# Altium PCB PCB1.pcbdoc
Units mil, origin at the board's own origin, x right, y up, seen from the top; angles counter-clockwise.
Board outline 3095 x 3275 mil, 2 copper layers (Top Layer, Bottom Layer); 43 components, 35 nets, 210 pads, 97 vias.
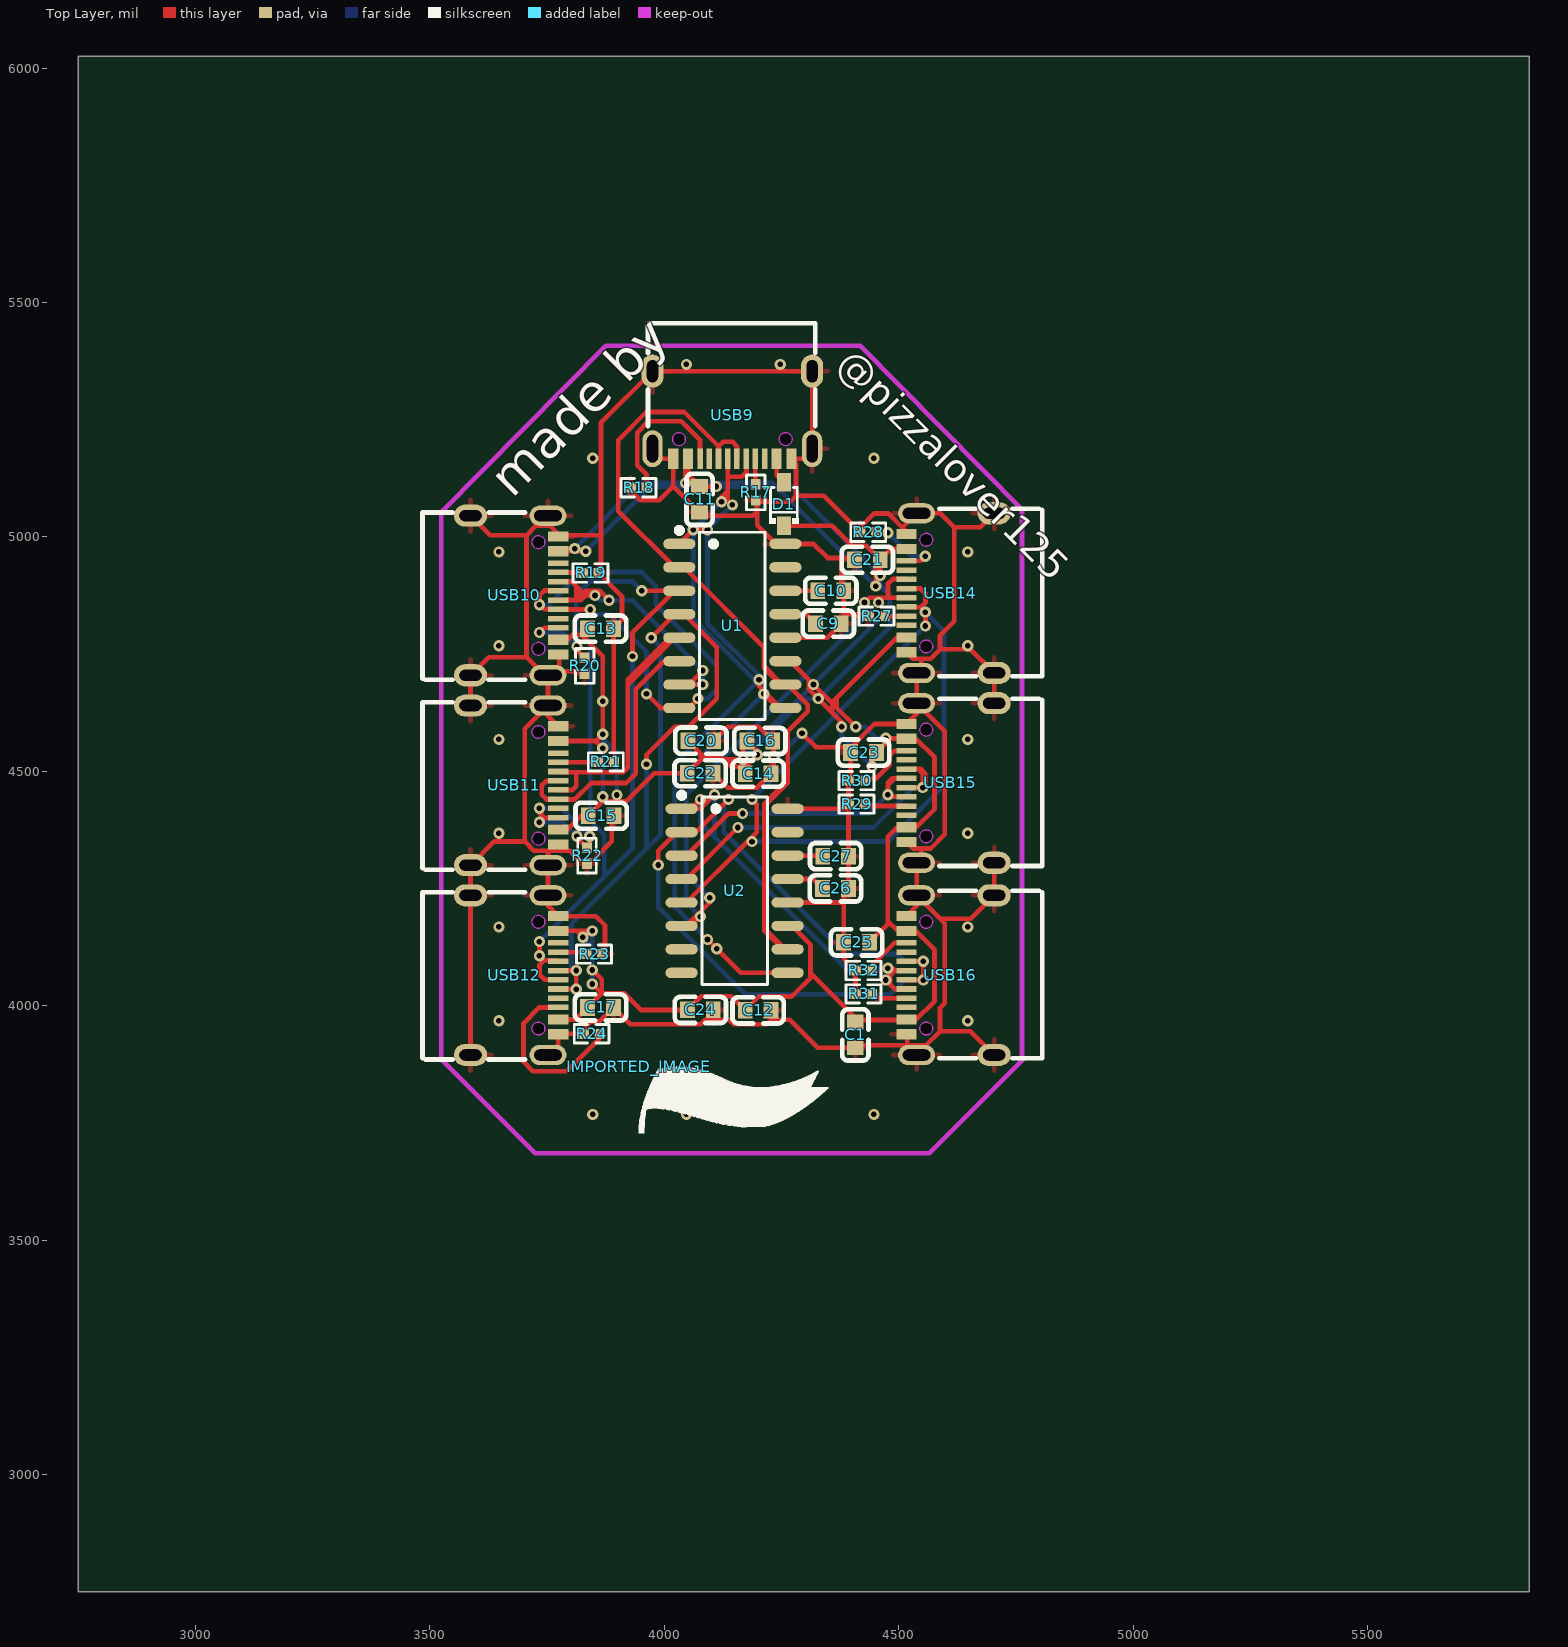
[diagram p0: Top Layer view]
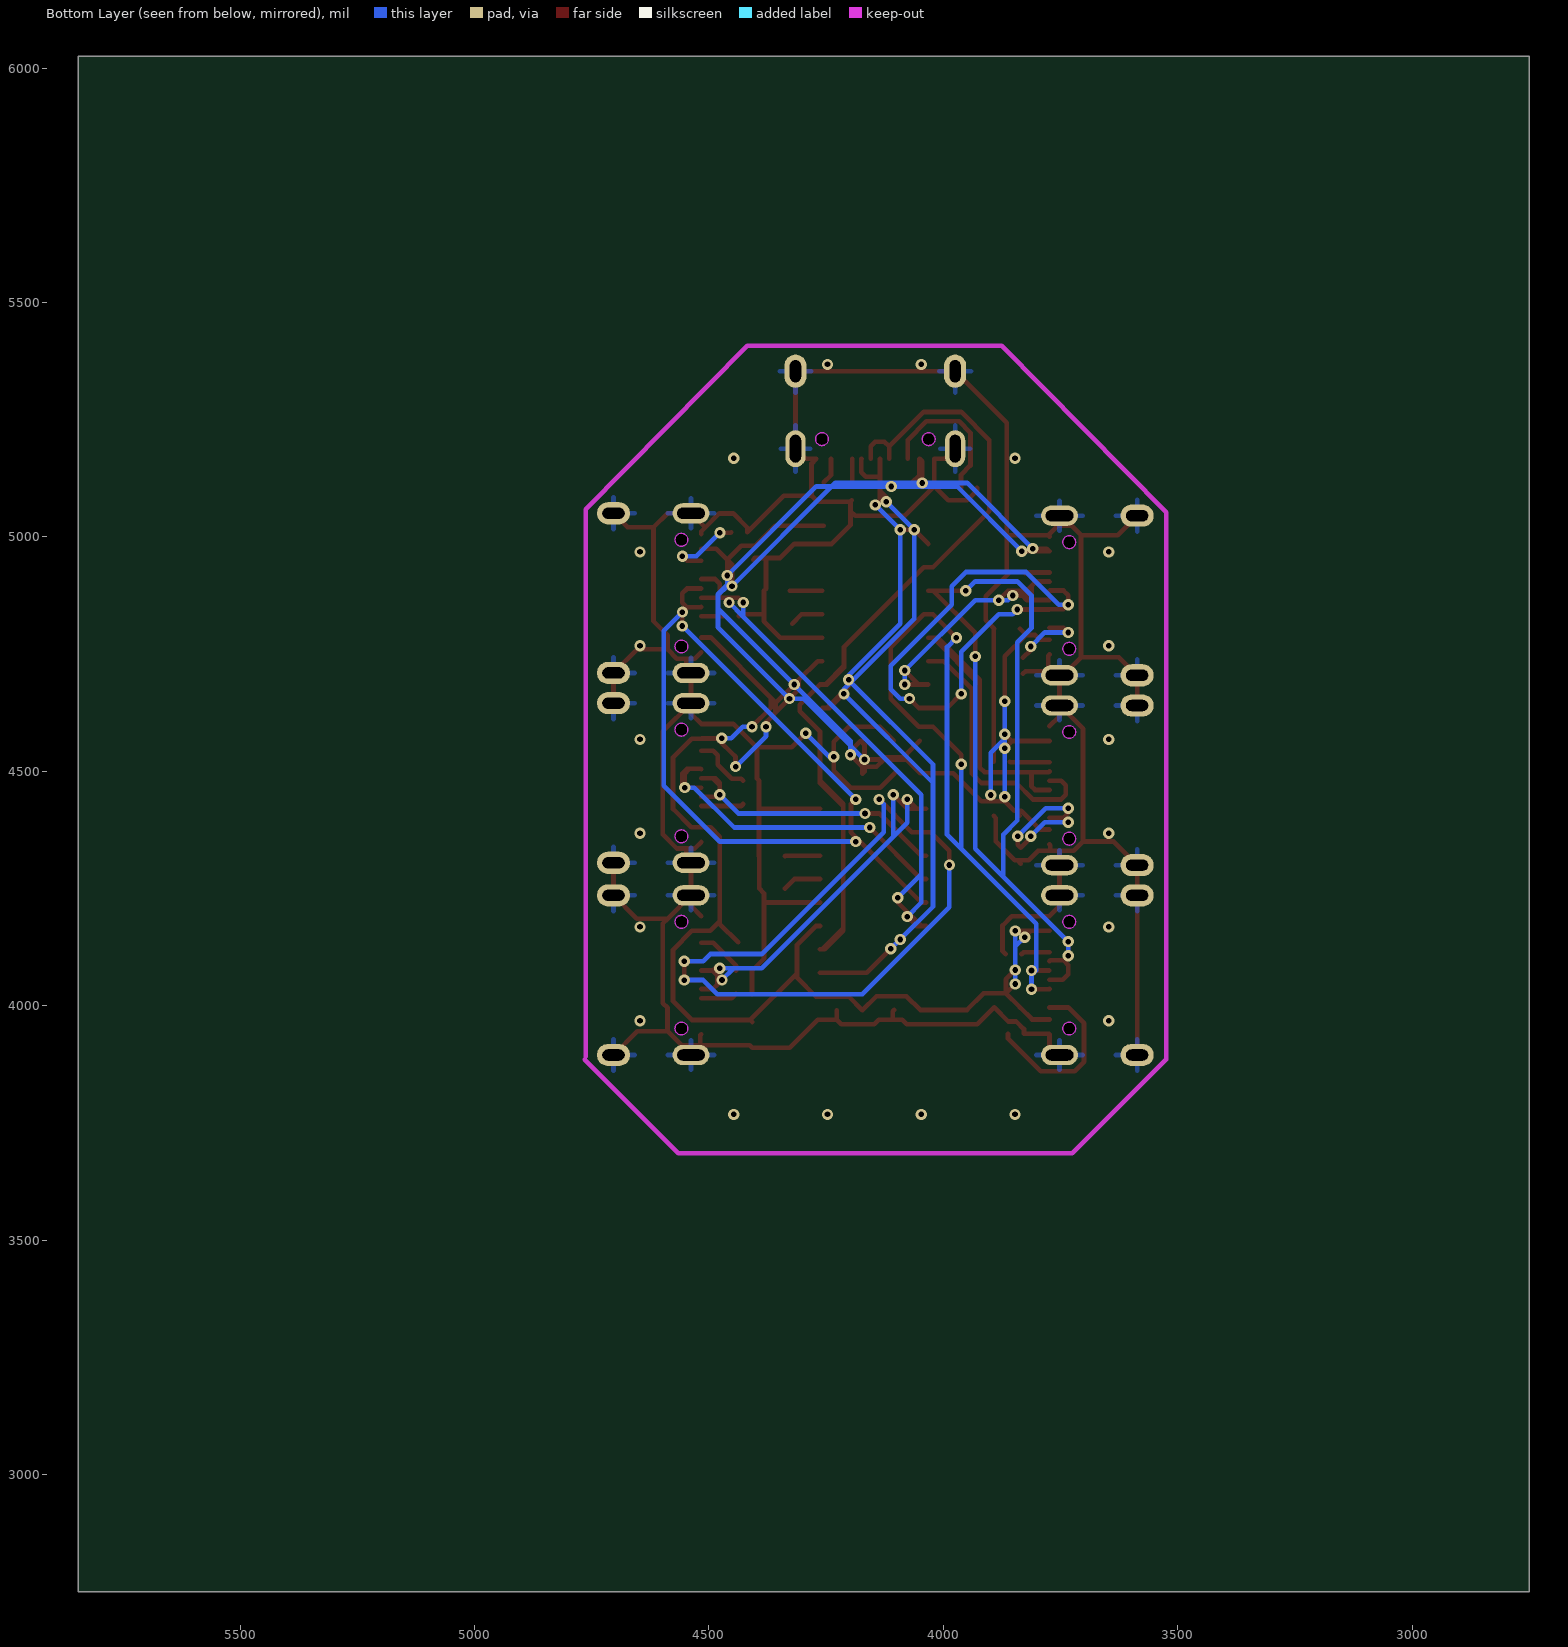
[diagram p1: Bottom Layer view, seen from below]

## Layer stack, top to bottom
Top Layer: signal copper (thickness not stored)
Dielectric: dielectric 12.6, FR-4, Dk 4.8
Bottom Layer: signal copper (thickness not stored)

## Board outline
5845,2750 2750,2750 2750,6025 5845,6025

## Design rules (kind name [scope] priority, off if disabled: settings)
BoardOutlineClearance copperThickness1oz [All] p0: genericclearance=10 ignorepadtopadclearanceinfootprint=FALSE except(0: Arc-SplitContinuation Track-SplitContinuation SMDPad-SplitContinuation THPad-SplitContinuation Via-SplitContinuation Fill-SplitContinuation Poly-SplitContinuation Region-SplitContinuation Text-SplitContinuation; 6: Track-CutoutEdge SMDPad-CutoutEdge THPad-CutoutEdge Via-CutoutEdge Region-CutoutEdge; 11.8: Track-OutlineEdge SMDPad-OutlineEdge THPad-OutlineEdge Via-OutlineEdge Fill-OutlineEdge Region-OutlineEdge Poly-OutlineEdge Text-OutlineEdge Fill-CutoutEdge)
BoardOutlineClearance copperThickness2oz [All] p0: genericclearance=10 ignorepadtopadclearanceinfootprint=FALSE except(0: Arc-SplitContinuation Track-SplitContinuation SMDPad-SplitContinuation THPad-SplitContinuation Via-SplitContinuation Fill-SplitContinuation Poly-SplitContinuation Region-SplitContinuation Text-SplitContinuation; 6: Track-CutoutEdge SMDPad-CutoutEdge THPad-CutoutEdge Via-CutoutEdge Region-CutoutEdge; 11.8: Track-OutlineEdge SMDPad-OutlineEdge THPad-OutlineEdge Via-OutlineEdge Fill-OutlineEdge Region-OutlineEdge Poly-OutlineEdge Text-OutlineEdge Fill-CutoutEdge)
Clearance copperThickness1oz [(InNet('GND') OR InNet('+5V') OR InNet('$1N7750') OR InNet('$1N7762') OR InNet('$1N10829') OR InNet('$1N10867') OR InNet('$1N10662') OR InNet('$1N4825') OR InNet('$1N8251') OR InNet('$1N8641') OR InNet('$1N9036') OR InNet('$1N9826') OR InNet('$1N10221') OR InNet('$1N10616') OR InNet('DN') OR InNet('DP') OR InNet('N3') OR InNet('P3') OR InNet('N2') OR InNet('P2') OR InNet('N1') OR InNet('P1') OR InNet('N7') OR InNet('P7') OR InNet('N6') OR InNet('P6') OR InNet('N5') OR InNet('P5') OR InNet('$1N11137') OR InNet('$1N11118') OR InNet('$1N11102') OR InNet('$1N11087') OR InNet('$1N11071') OR InNet('$1N11153') OR InNet('$1N11169'))] p1: gap=7 ignorepadtopadclearanceinfootprint=FALSE except(4: Track-Track; 6: Track-SMDPad SMDPad-SMDPad Track-THPad SMDPad-THPad THPad-THPad Track-Via SMDPad-Via THPad-Via Via-Via SMDPad-Fill THPad-Fill Via-Fill Fill-Fill Track-Region SMDPad-Region THPad-Region Via-Region Region-Region Track-Poly SMDPad-Poly THPad-Poly Via-Poly Fill-Poly Region-Poly Poly-Poly Track-Text SMDPad-Text THPad-Text Via-Text Fill-Text Region-Text Poly-Text Text-Text; 6.9: Track-Hole SMDPad-Hole THPad-Hole Via-Hole Fill-Hole Region-Hole Poly-Hole Text-Hole Sheet-Hole; 11.8: Track-Fill Fill-Region Track-Sheet SMDPad-Sheet THPad-Sheet Via-Sheet Fill-Sheet Region-Sheet Poly-Sheet Text-Sheet)
Clearance copperThickness2oz [All] p1: gap=7 ignorepadtopadclearanceinfootprint=FALSE except(6: Track-SMDPad SMDPad-SMDPad Track-THPad SMDPad-THPad THPad-THPad Track-Via SMDPad-Via THPad-Via Via-Via SMDPad-Fill THPad-Fill Via-Fill Fill-Fill Track-Region SMDPad-Region THPad-Region Via-Region Region-Region Track-Poly SMDPad-Poly THPad-Poly Via-Poly Fill-Poly Region-Poly Poly-Poly Track-Text SMDPad-Text THPad-Text Via-Text Fill-Text Region-Text Poly-Text Text-Text; 6.9: Track-Hole SMDPad-Hole THPad-Hole Via-Hole Fill-Hole Region-Hole Poly-Hole Text-Hole Sheet-Hole; 8: Track-Track; 11.8: Track-Fill Fill-Region Track-Sheet SMDPad-Sheet THPad-Sheet Via-Sheet Fill-Sheet Region-Sheet Poly-Sheet Text-Sheet)
DiffPairsRouting differentialPair [All] p1: maxuncoupledlength=10 minlimit=6 maxlimit=6 mostfreqgap=6 toplayer_minwidth=5 toplayer_prefwidth=10 toplayer_maxwidth=100 bottomlayer_minwidth=5 bottomlayer_prefwidth=10 bottomlayer_maxwidth=100
PasteMaskExpansion pasteMaskExpansion [All] p1: expansion=0
PlaneConnect innerPlane [All] p1: planeconnectstyle=Relief reliefexpansion=20 reliefentries=4 reliefconductorwidth=10 reliefairgap=10
PolygonConnect copperRegion [All] p1: connectstyle=Relief reliefentries=4 reliefconductorwidth=10 polygonreliefangle="90 Angle" airgapwidth=10
RoutingVias viaSize [All] p1: viastyle="Through Hole" holewidth=12.0078 minholewidth=11.811 maxholewidth=248.0314 width=24.0158 minwidth=19.685 maxwidth=393.7008
SolderMaskExpansion solderMaskExpansion [All] p1: useseparateexpansions=TRUE expansion=2 expansionbottom=2
Width copperThickness1oz [All] p1: maxlimit=100 minlimit=5 preferedwidth=10
Width copperThickness2oz [All] p1: maxlimit=100 minlimit=8 preferedwidth=10

## Components (designator, comment, footprint, x,y, rotation, side; value= is the part's Value field where it differs from the comment)
C1 "" C0603 4407.56,3937.56 r270 top
C9 "" C0603 4350,4815 r180 top
C10 "" C0603 4355,4885 r180 top
C11 "" C0603 4075,5080 r270 top
C12 "" C0603 4200,3990 r0 top
C13 "" C0603 3863.86,4804.33 r0 top
C14 "" C0603 4200,4495 r0 top
C15 "" C0603 3865,4405 r0 top
C16 "" C0603 4203.86,4564.64 r0 top
C17 "" C0603 3863.86,3996.16 r0 top
C20 "" C0603 4078.02,4565.24 r0 top
C21 "" C0603 4433.14,4951.15 r180 top
C22 "" C0603 4076.32,4495.83 r0 top
C23 "" C0603 4424.88,4540 r180 top
C24 "" C0603 4076.91,3990.83 r0 top
C25 "" C0603 4410,4135 r180 top
C26 "" C0603 4365,4250 r180 top
C27 "" C0603 4365.29,4319.02 r180 top
D1 "" SOD-323_L1.8-W1.3-LS2.5-RD 4255,5070 r90 top
IMPORTED_IMAGE "IMPORTED_IMAGE" IMPORTED_IMAGE 3945,3870 r0 top
R17 "" R0402 4195,5095 r90 top
R18 "" R0402 3945,5105 r0 top
R19 "" R0402 3842.52,4922.98 r180 top
R20 "" R0402 3830,4725 r90 top
R21 "" R0402 3875,4520 r180 top
R22 "" R0402 3835,4320 r90 top
R23 "" R0402 3850,4110 r180 top
R24 "" R0402 3845,3940 r0 top
R27 "" R0402 4452.61,4831.05 r0 top
R28 "" R0402 4435,5010 r0 top
R29 "" R0402 4410,4430 r0 top
R30 "" R0402 4410,4480 r0 top
R31 "" R0402 4425,4025 r0 top
R32 "" R0402 4425,4075 r0 top
U1 "" SOP-16_L10.0-W3.9-P1.27-LS6.0-BL 4145,4810 r270 top
U2 "" SOP-16_L10.0-W3.9-P1.27-LS6.0-BL 4150,4245 r270 top
USB9 "" USB-C-SMD_TYPE-C-6PIN-2MD-073#1 4145,5260 r180 top
USB10 "" USB-C-SMD_TYPE-C-6PIN-2MD-073#2 3680,4875 r270 top
USB11 "" USB-C-SMD_TYPE-C-6PIN-2MD-073#2 3680,4470 r270 top
USB12 "" USB-C-SMD_TYPE-C-6PIN-2MD-073#2 3680,4065 r270 top
USB14 "" USB-C-SMD_TYPE-C-6PIN-2MD-073#2 4610,4880 r90 top
USB15 "" USB-C-SMD_TYPE-C-6PIN-2MD-073#2 4610,4475 r90 top
USB16 "" USB-C-SMD_TYPE-C-6PIN-2MD-073#2 4610,4065 r90 top

## Footprints (in the part's own frame and the unit in brackets; to place one, negate y for a bottom-side part, rotate by r counter-clockwise, add the part's x,y. Pads: shape width x height; smd on the part's side, far side on the other; paste and mask are expansions set on the pad)
C0603 [mm]
  rect 0.8x0.9 smd: 1(-0.7,0) 2(0.7,0)
  silkscreen extent -1.39,-0.71 1.39,0.71
IMPORTED_IMAGE [mil]
  silkscreen extent 0,-142 405,0
R0402 [mm]
  rect 0.566x0.54 smd: 1(-0.433,0) 2(0.433,0)
  silkscreen extent -0.94,-0.5 0.94,0.5
SOD-323_L1.8-W1.3-LS2.5-RD [mm]
  rect 1x0.75 smd: 1(-1.173,0) 2(1.173,0)
  silkscreen extent -1.08,-0.8 0.9,0.8
SOP-16_L10.0-W3.9-P1.27-LS6.0-BL [mm]
  oval 0.56x1.745 smd: 1(-4.445,-2.872) 2(-3.175,-2.872) 3(-1.905,-2.872) 4(-0.635,-2.872) 5(0.635,-2.872) 6(1.905,-2.872) 7(3.175,-2.872) 8(4.445,-2.872) 9(4.445,2.872) 10(3.175,2.872) 11(1.905,2.872) 12(0.635,2.872) 13(-0.635,2.872) 14(-1.905,2.872) 15(-3.175,2.872) 16(-4.445,2.872)
  silkscreen extent -5.33,-3.02 5.08,1.77
USB-C-SMD_TYPE-C-6PIN-2MD-073#1 [mm]
  rect 0.55x1.1 smd: 1(-3.2,2.375) 2(-2.4,2.375) 11(2.4,2.375) 12(3.2,2.375)
  rect 0.3x1.1 smd: 3(-1.75,2.375) 4(-1.25,2.375) 5(-0.75,2.375) 6(-0.25,2.375) 7(0.25,2.375) 8(0.75,2.375) 9(1.25,2.375) 10(1.75,2.375)
  oval 1.2x1.8 hole 0.6 slot 1.2 at 90 deg: 13(-4.325,-2.375) 14(4.325,-2.375)
  oval 1.1x2 hole 0.6 slot 1.5 at 90 deg: 13(-4.325,1.825) 14(4.325,1.825)
  Board Outline Layer circle w0.005: c-2.89,1.305 r0.35
  Board Outline Layer circle w0.005: c2.89,1.305 r0.35
  Board Outline Layer region: -3.24,1.305 -3.205,1.457 -3.108,1.579 -2.968,1.646 -2.812,1.646 -2.672,1.579 -2.575,1.457 -2.54,1.305 -2.54,1.305 -2.575,1.153 -2.672,1.031 -2.812,0.964 -2.968,0.964 -3.108,1.031 -3.205,1.153 -3.24,1.305
  Board Outline Layer region: 2.54,1.305 2.575,1.457 2.672,1.579 2.812,1.646 2.968,1.646 3.108,1.579 3.205,1.457 3.24,1.305 3.24,1.305 3.205,1.153 3.108,1.031 2.968,0.964 2.812,0.964 2.672,1.031 2.575,1.153 2.54,1.305
  Multi-Layer board cut-out: -3.24,1.305 -3.205,1.457 -3.108,1.579 -2.968,1.646 -2.812,1.646 -2.672,1.579 -2.575,1.457 -2.54,1.305 -2.54,1.305 -2.575,1.153 -2.672,1.031 -2.812,0.964 -2.968,0.964 -3.108,1.031 -3.205,1.153 -3.24,1.305
  Multi-Layer board cut-out: 2.54,1.305 2.575,1.457 2.672,1.579 2.812,1.646 2.968,1.646 3.108,1.579 3.205,1.457 3.24,1.305 3.24,1.305 3.205,1.153 3.108,1.031 2.968,0.964 2.812,0.964 2.672,1.031 2.575,1.153 2.54,1.305
  silkscreen extent -4.5,-4.97 4.57,0.6
USB-C-SMD_TYPE-C-6PIN-2MD-073#2 [mm]
  rect 0.55x1.1 smd: 1(-3.2,2.375) 2(-2.4,2.375) 11(2.4,2.375) 12(3.2,2.375)
  rect 0.3x1.1 smd: 3(-1.75,2.375) 4(-1.25,2.375) 5(-0.75,2.375) 6(-0.25,2.375) 7(0.25,2.375) 8(0.75,2.375) 9(1.25,2.375) 10(1.75,2.375)
  oval 1.2x1.8 hole 0.6 slot 1.2 at 90 deg: 13(-4.325,-2.375) 14(4.325,-2.375)
  oval 1.1x2 hole 0.6 slot 1.5 at 90 deg: 13(-4.325,1.825) 14(4.325,1.825)
  Board Outline Layer circle w0.005: c-2.89,1.305 r0.35
  Board Outline Layer circle w0.005: c2.89,1.305 r0.35
  Board Outline Layer region: -2.89,1.655 -2.738,1.62 -2.616,1.523 -2.549,1.383 -2.549,1.227 -2.616,1.087 -2.738,0.99 -2.89,0.955 -2.89,0.955 -3.042,0.99 -3.164,1.087 -3.231,1.227 -3.231,1.383 -3.164,1.523 -3.042,1.62 -2.89,1.655
  Board Outline Layer region: 2.89,1.655 3.042,1.62 3.164,1.523 3.231,1.383 3.231,1.227 3.164,1.087 3.042,0.99 2.89,0.955 2.89,0.955 2.738,0.99 2.616,1.087 2.549,1.227 2.549,1.383 2.616,1.523 2.738,1.62 2.89,1.655
  Multi-Layer board cut-out: -2.89,1.655 -2.738,1.62 -2.616,1.523 -2.549,1.383 -2.549,1.227 -2.616,1.087 -2.738,0.99 -2.89,0.955 -2.89,0.955 -3.042,0.99 -3.164,1.087 -3.231,1.227 -3.231,1.383 -3.164,1.523 -3.042,1.62 -2.89,1.655
  Multi-Layer board cut-out: 2.89,1.655 3.042,1.62 3.164,1.523 3.231,1.383 3.231,1.227 3.164,1.087 3.042,0.99 2.89,0.955 2.89,0.955 2.738,0.99 2.616,1.087 2.549,1.227 2.549,1.383 2.616,1.523 2.738,1.62 2.89,1.655
  silkscreen extent -4.5,-4.97 4.57,0.6

## Via types
v1: diameter 24.02, hole 12.01, Top Layer to Bottom Layer, 97 vias

## Nets (pads, with @x,y where several pads share a name; then routed paths per layer and width w, separated by ;. In a path a pad name is that pad's centre, name@x,y a point inside that pad or via, vN(x,y) a via of type N, cw(c..) or ccw(c..) an arc to the next point about the centre after c; other vN are vias at no path point)
$1N4825: R17.2 USB9.4 | length 54.8
  Top Layer w10: USB9.4 4194.2,5112.84 R17.2
$1N7750: C9.2 U1.13 | length 72.6
  Top Layer w10: U1.13 4302.44,4835 C9.2
$1N7762: C10.2 U1.14 | length 69.3
  Top Layer w10: U1.14 C10.2
$1N8251: R19.2 USB10.4 | length 52.5
  Top Layer w10: USB10.4 3824.25,4924.2 R19.2
$1N8641: R21.2 USB11.4 | length 84.8
  Top Layer w10: USB11.4 3857.16,4519.2 R21.2
$1N9036: R23.2 USB12.4 | length 61.2
  Top Layer w10: USB12.4 3828.76,4114.2 R23.2
$1N9826: R27.2 USB14.4 | length 46.6
  Top Layer w10: R27.2@4469.9,4830.8 USB14.4
$1N10221: R29.2 USB15.4 | length 91.2
  Top Layer w10: R29.2 4431.24,4425.8 USB15.4
$1N10616: R31.2 USB16.4 | length 78.3
  Top Layer w10: R31.2 4451.24,4015.8 USB16.4
$1N10662: D1.2 USB9.2 | length 56.8
  Top Layer w10: USB9.2 4239.48,5131.68 D1.2
$1N10829: C26.2 U2.13 | length 82.6
  Top Layer w10: U2.13 4317.44,4270 C26.2
$1N10867: C27.2 U2.14 | length 75
  Top Layer w10: U2.14 4336.75,4320 C27.2
$1N11071: R28.2 USB14.10 | length 169.8
  Top Layer w10: R28.2 4453.14,5008.9 v1(4476.49,5008.9) ; USB14.10 4546.49,4948.9 v1(4556.49,4958.9)
  Bottom Layer w10: v1(4476.49,5008.9) 4526.49,4958.9 v1(4556.49,4958.9)
$1N11087: R24.2 USB12.10 | length 379.9
  Top Layer w10: USB12.10 3733.51,3996.09 3699.6,3962.19 3699.6,3880 3719.6,3860 3792.04,3860 3862.04,3930 R24.2
$1N11102: R22.2 USB11.10 | length 352.5
  Top Layer w10: v1(3733.51,4391.1) 3743.51,4401.1 ; v1(3733.51,4421.1) 3733.51,4411.1 3743.51,4401.1 ; USB11.10 3743.51,4401.1 ; v1(3813.51,4361.1) 3813.51,4358.53 R22.2 3840.95,4342.98 v1(3840.95,4361.1)
  Bottom Layer w10: v1(3733.51,4391.1) 3783.51,4391.1 v1(3813.51,4361.1) ; v1(3733.51,4421.1) 3780.95,4421.1 v1(3840.95,4361.1)
$1N11118: R20.2 USB10.10 | length 167.5
  Top Layer w10: v1(3733.51,4796.1) 3743.51,4806.1 USB10.10 ; v1(3813.51,4766.1) 3813.51,4758.53 R20.2
  Bottom Layer w10: v1(3733.51,4796.1) 3783.51,4796.1 v1(3813.51,4766.1)
$1N11137: R18.2 USB9.10 | length 326.3
  Top Layer w10: R18.2 3962.04,5132.44 3942.04,5152.44 3942.04,5222.44 3966.09,5246.49 4036.09,5246.49 4076.09,5206.49 USB9.10
$1N11153: R30.2 USB15.10 | length 127.6
  Top Layer w10: R30.2 4430.94,4483.9 4450.94,4483.9 4480.94,4513.9 4480.94,4533.9 4490.94,4543.9 USB15.10
$1N11169: R32.2 USB16.10 | length 104.7
  Top Layer w10: R32.2 4442.04,4085 4490.94,4133.9 USB16.10
+5V: C1.1 C11.1 C12.1 C13.1 C14.1 C15.1 C16.1 C17.1 C20.1 C21.1 C22.1 C23.1 C24.1 C25.1 D1.1 U1.11 U2.11 USB9.11 USB10.2 USB10.11 USB11.2 USB11.11 USB12.2 USB12.11 USB14.2 USB14.11 USB15.2 USB15.11 USB16.2 USB16.11 | length 7981.9
  Top Layer w10: USB12.11 3810.65,3970.51 C17.1 3866.3,4026.16 ; USB12.2 3812.97,4159.48 ; USB11.11 3773.83,4375.83 3793.83,4375.83 3833.83,4415.83 C15.1@3838.76,4415.83 ; USB11.2 3853.51,4564.48 ; USB10.11 3793.51,4780.51 3803.51,4790.51 C13.1@3823.51,4790.51 ; v1(3809.02,4975) 3779.02,4975 USB10.2 v1(3832.57,4969.48) ; v1(3826.3,4146.15) 3812.97,4159.48 ; C13.1 3823.51,4791.54 C13.1@3823.51,4790.51 ; C15.1 3838.76,4406.32 C15.1@3838.76,4415.83 ; v1(3846.3,4046.16) 3866.3,4026.16 ; v1(3846.3,4076.16) 3866.3,4056.16 3866.3,4026.16 ; v1(3846.3,4159.48) 3812.97,4159.48 ; v1(3868.76,4445.83) v1@3868.76,4435.83 ; v1(3868.76,4549.23) 3853.51,4564.48 ; v1(3898.76,4449.23) 3898.76,4435.83 ; C20.1 4078.09,4537.61 ; v1(4110.7,5107.61) C11.1 C11.1@4067.56,5115 ; D1.1 4358.02,5023.84 4400.7,4981.15 4430.7,4981.15 C21.1 ; U1.11 4268.09,4735 4308.09,4695 ; U2.11 4271.43,4170 4311.94,4129.49 4311.94,4069.49 ; v1(4378.09,4595) 4378.09,4605 4358.09,4625 ; C1.1 C1.1@4411.94,3969.49 ; v1(4408.09,4595) 4368.09,4635 ; C25.1 4476.49,4173.94 4476.49,4180.52 ; v1(4443.09,4510) 4443.09,4530.65 C23.1 v1@4472.44,4560 ; v1(4450.7,4895) 4450.7,4941.15 C21.1 ; v1(4460.7,4917.61) C21.1 ; USB14.2 4496.49,4785.52 4368.09,4657.11 ; USB14.11 4484.04,4974.49 C21.1 ; C13.1@3823.51,4790.51 3868.76,4745.25 v1(3868.76,4649.23) v1(3868.76,4579.23) 3854.01,4564.48 3853.51,4564.48 ; C15.1@3838.76,4415.83 3848.76,4415.83 v1@3868.76,4435.83 ; 3866.3,4026.16 3914.02,4026.16 3949.34,3990.83 C24.1 4078.51,4020 4142.44,4020 C12.1 4201.94,4019.49 4271.94,4019.49 4311.94,4059.49 4311.94,4069.49 ; v1@3868.76,4435.83 3898.76,4435.83 ; 3898.76,4435.83 3918.76,4435.83 3978.76,4495.83 C22.1 4077.93,4525 ; C11.1@4067.56,5115 v1(4045,5115) 4045,5160.99 USB9.11 4050.51,5132.06 C11.1@4067.56,5115 ; 4077.93,4525 4078.09,4525.16 ; 4077.93,4525 4078.09,4525 ; 4078.09,4525 4078.09,4525.16 ; 4078.09,4525 4126.79,4525 ; 4078.09,4525.16 4082.28,4529.35 4082.44,4529.35 ; 4078.09,4525.16 4078.09,4537.61 ; 4078.09,4537.61 4082.44,4533.26 4082.44,4529.35 ; 4082.44,4529.35 4122.44,4529.35 4126.79,4525 ; 4126.79,4525 4142.44,4509.35 C14.1@4168.09,4509.35 ; 4126.79,4525 4158.09,4525 v1@4168.09,4515 ; C14.1@4168.09,4509.35 C14.1@4172.44,4509.35 ; C14.1@4168.09,4509.35 v1@4168.09,4515 ; C14.1@4168.09,4509.35 4168.09,4499.35 C14.1 C14.1@4172.44,4509.35 ; v1@4168.09,4515 v1(4168.09,4525) 4168.09,4556.44 C16.1 4198.09,4542.85 v1(4198.09,4535) C14.1@4172.44,4509.35 ; 4308.09,4695 4308.09,4675 v1(4328.09,4655) 4358.09,4625 ; 4308.09,4695 v1(4318.09,4685) 4358.09,4645 ; 4311.94,4069.49 C1.1@4411.94,3969.49 ; 4358.09,4625 4358.09,4645 ; 4358.09,4645 4368.09,4635 ; 4358.09,4645 4358.09,4647.11 4368.09,4657.11 ; 4368.09,4635 4368.09,4657.11 ; C1.1@4411.94,3969.49 4536.49,3969.49 4576.49,4009.49 4576.49,4119.49 4536.49,4159.49 USB16.11 4497.52,4159.49 4476.49,4180.52 ; v1@4472.44,4560 v1(4472.44,4570.65) 4515.34,4570.65 USB15.11 ; v1@4472.44,4560 4481.94,4569.49 USB15.11 ; 4476.49,4180.52 4476.49,4360.52 4496.49,4380.52 USB15.2 4537.52,4380.52 4576.49,4419.49 4576.49,4529.49 4536.49,4569.49 USB15.11
  Bottom Layer w10: v1(3809.02,4975) 3949.02,5115 v1(4045,5115) 4230.7,5115 4238.09,5107.61 ; v1(3826.3,4146.15) 3846.3,4126.15 ; v1(3832.57,4969.48) 3970.7,5107.61 v1(4110.7,5107.61) 4238.09,5107.61 ; v1(3846.3,4046.16) v1(3846.3,4076.16) 3846.3,4126.15 ; v1(3846.3,4159.48) 3846.3,4126.15 ; v1(3868.76,4445.83) v1(3868.76,4549.23) v1@3868.76,4569.23 ; v1(3868.76,4649.23) v1(3868.76,4579.23) v1@3868.76,4569.23 ; v1(3898.76,4449.23) 3898.76,4539.23 v1@3868.76,4569.23 ; v1(4168.09,4525) 4198.09,4555 ; v1(4198.09,4535) 4198.09,4555 ; v1(4378.09,4595) 4378.09,4575 v1(4443.09,4510) ; v1(4408.09,4595) 4428.09,4595 4452.44,4570.65 v1(4472.44,4570.65) ; 4198.09,4555 4198.09,4565 v1(4318.09,4685) 4480.7,4847.61 ; 4198.09,4555 4298.09,4655 v1(4328.09,4655) 4480.7,4807.61 4480.7,4847.61 ; 4238.09,5107.61 4270.7,5107.61 v1(4460.7,4917.61) 4460.7,4897.61 4480.7,4877.61 4480.7,4875 ; 4238.09,5107.61 v1(4450.7,4895) 4460.7,4895 4480.7,4875 ; 4480.7,4847.61 4480.7,4875
DN: U1.1 U1.9 U2.9 USB9.5 USB9.7 | length 2506.8
  Top Layer w10: U1.1 v1(4061.91,5015) v1(4091.91,5015) ; v1(4091.91,4141.18) v1(4111.91,4121.18) 4163.09,4070 U2.9 ; v1(4121.91,5075) 4121.91,5085 4135.15,5098.24 ; USB9.7 4135.15,5128.24 ; v1(4145.15,5068.24) 4135.15,5078.24 4135.15,5098.24 ; USB9.5 4175.15,5165.86 4175.15,5138.24 4165.15,5128.24 4135.15,5128.24 ; v1(4201.91,4695) 4201.91,4681.18 U1.9@4248.09,4635 ; v1(4211.91,4665) 4241.91,4635 U1.9@4248.09,4635 ; U1.9 U1.9@4248.09,4635 ; 4135.15,5098.24 4135.15,5128.24
  Bottom Layer w10: v1(4111.91,4121.18) v1(4091.91,4141.18) 4021.91,4211.18 4021.91,4475 ; v1(4121.91,5075) v1(4061.91,5015) 4061.91,4825 v1@4196.91,4690 ; v1(4145.15,5068.24) v1(4091.91,5015) 4091.91,4815 4201.91,4705 v1(4201.91,4695) v1@4196.91,4690 ; 4021.91,4475 v1(4211.91,4665) 4211.91,4675 v1@4196.91,4690 ; 4021.91,4475 4021.91,4515 v1@4196.91,4690
DP: U1.2 U1.10 U2.10 USB9.6 USB9.8 | length 1905.9
  Top Layer w10: USB9.8 4115.48,5192.93 ; USB9.6 4154.85,5193.56 4145.48,5202.93 4125.48,5202.93 4115.48,5192.93 ; U2.10 U2.10@4258.09,4120 ; 4115.48,5192.93 4041.91,5266.49 3961.91,5266.49 3901.91,5206.49 3901.91,5055 4021.91,4935 U1.2 4041.91,4935 4211.91,4765 4211.91,4725 ; 4211.91,4725 U1.10@4251.91,4685 ; 4211.91,4725 4211.91,4721.18 4248.09,4685 U1.10@4251.91,4685 ; 4213.09,4165 U2.10@4258.09,4120 ; 4213.09,4165 4213.09,4425 ; 4213.09,4165 4213.09,4160 4253.09,4120 U2.10@4258.09,4120 ; 4213.09,4425 4263.09,4475 4263.09,4480.77 ; 4213.09,4425 4213.09,4430.77 4263.09,4480.77 ; U1.10@4251.91,4685 U1.10 4263.09,4685 4306.02,4642.07 4306.02,4627.93 4263.09,4585 4263.09,4480.77
GND: C1.2 C9.1 C10.1 C11.2 C12.2 C13.2 C14.2 C15.2 C16.2 C17.2 C20.2 C21.2 C22.2 C23.2 C24.2 C25.2 C26.1 C27.1 R17.1 R18.1 R19.1 R20.1 R21.1 R22.1 R23.1 R24.1 R27.1 R28.1 R29.1 R30.1 R31.1 R32.1 U1.12 U1.16 U2.12 U2.16 USB9.1 USB9.12 USB9.13 USB9.14 USB10.1 USB10.12 USB10.13 USB10.14 USB11.1 USB11.12 USB11.13 USB11.14 USB12.1 USB12.12 USB12.13 USB12.14 USB14.1 USB14.12 USB14.13 USB14.14 USB15.1 USB15.12 USB15.13 USB15.14 USB16.1 USB16.12 USB16.13 USB16.14 | length 10305.7
  Top Layer w10: USB12.14@3586.49,3894.72 3586.49,4235.27 3586.49,4299.73 3637.05,4350.27 3701.86,4350.27 ; USB11.13@3586.49,4640.27 3586.49,4704.73 3625.28,4743.51 3706.03,4743.51 ; USB10.13@3586.49,5045.27 3628.26,5003.51 3706.03,5003.51 ; USB12.14@3751.86,3894.72 3773.51,3916.38 USB12.12 3774.49,3940 R24.1 3827.96,3950 3844.11,3966.16 3861.42,3966.16 C17.2 3927.57,3960 4077.56,3960 4087.56,3970 4107.56,3970 ; USB10.13@3751.86,5045.27 3756.03,5041.1 3756.03,5023.51 ; USB11.12 3771.86,4342.36 3771.86,4330.27 ; USB11.1 3751.86,4617.64 USB11.13@3751.86,4640.27 ; USB10.12 3776.03,4746.49 USB10.14@3776.03,4713.51 ; USB10.1 USB10.1@3776.03,5003.51 ; R20.1 3824.45,4713.51 USB10.14@3776.03,4713.51 ; R22.1 3837.84,4305.8 R22.1@3837.84,4310.27 ; R23.1 3873.51,4116.47 3873.51,4170.98 3853.51,4190.98 USB12.1 3751.86,4212.64 3751.86,4235.27 3751.86,4299.73 3751.86,4330.27 ; R21.1 3892.04,4803.7 C13.2 3909.56,4822.47 3909.56,4872.98 R19.1 3864.72,4928.14 3864.72,5003.51 ; C15.2 3887.84,4400.27 3887.84,4350.27 3847.84,4310.27 R22.1@3837.84,4310.27 ; R18.1 3927.96,5099.48 3949.01,5078.43 3989.01,5078.43 4019.01,5108.43 ; USB9.14@3974.72,5188.15 3996.38,5166.49 USB9.12 4019.01,5108.43 ; C22.2 4134.71,4465 4197.56,4465 C14.2 4233.55,4500.98 v1(4233.55,4530.98) 4233.55,4562.51 C16.2 4201.42,4594.64 4134.99,4594.64 C20.2 ; C24.2 4107.56,3987.74 4107.56,3970 ; R17.1 R17.1@4198.09,5075 ; C12.2 4227.56,3970 ; U1.12 4347.56,4785 C9.1 4382.56,4820 4382.56,4835 ; U2.12 4382.56,4220 ; U2.16 R29.1@4392.96,4420 ; v1(4293.55,4580.98) 4323.55,4550.98 C23.2@4398.31,4550.98 ; C25.2 4382.44,4100.52 R32.1 R31.1 ; C25.2@4382.56,4135.12 4382.56,4220 ; C27.1 4392.85,4250.29 C26.1 4382.56,4240 4382.56,4220 ; C27.1@4392.96,4319.14 R29.1@4392.96,4420 ; C21.2 4401.74,4955 4378.09,4955 ; R27.1 4431.62,4835 4382.56,4835 ; USB16.1 4518.15,3937.36 USB16.13@4518.15,3915.28 ; USB16.12 4538.15,4212.64 USB16.14@4538.15,4235.27 ; USB15.1 4530.23,4335.27 4548.15,4335.27 ; USB14.1 4530.23,4740.27 4548.15,4740.27 ; USB14.12 4516.49,5011.47 4507.96,5020 ; USB16.13@4538.15,3894.72 USB16.13@4538.15,3915.28 ; USB16.13@4703.51,3894.72 4652.95,3945.28 4588.15,3945.28 ; USB15.13@4703.51,4304.73 4703.51,4235.27 4653.51,4185.27 4588.15,4185.27 ; USB15.14@4703.51,4645.27 4703.51,4709.73 4652.95,4760.27 4588.15,4760.27 ; USB14.14@4703.51,5050.27 4673.51,5020.27 4618.15,5020.27 ; 3701.86,4350.27 3701.86,4590.27 USB11.13@3751.86,4640.27 ; 3701.86,4350.27 3721.86,4330.27 3751.86,4330.27 ; 3706.03,4743.51 3706.03,5003.51 ; 3706.03,4743.51 3736.03,4713.51 USB10.14@3756.03,4713.51 ; 3706.03,5003.51 3726.03,5023.51 3756.03,5023.51 ; 3751.86,4330.27 3771.86,4330.27 ; USB11.13@3751.86,4640.27 3751.86,4704.73 3756.03,4708.9 USB10.14@3756.03,4713.51 ; USB10.14@3756.03,4713.51 USB10.14@3776.03,4713.51 ; 3756.03,5023.51 USB10.1@3776.03,5003.51 ; 3771.86,4330.27 3797.84,4330.27 3817.84,4310.27 R22.1@3837.84,4310.27 ; USB10.1@3776.03,5003.51 3864.72,5003.51 ; 3864.72,5003.51 3864.72,5243.51 3974.72,5353.51 4315.27,5353.51 4315.27,5188.15 4293.62,5166.49 USB9.1 4280.98,5156.49 4280.98,5087.9 ; 4019.01,5108.43 C11.2 4082.44,5045 4188.09,5045 4198.09,5055 ; 4107.56,3970 4137.56,3970 4147.56,3960 4217.56,3960 4227.56,3970 ; 4198.09,5055 4198.09,5025 4238.09,4985 U1.16 4318.09,4985 4348.09,4955 4378.09,4955 ; 4198.09,5055 R17.1@4198.09,5075 ; R17.1@4198.09,5075 4268.09,5075 4280.98,5087.9 ; 4227.56,3970 4267.56,3970 4327.56,3910 C1.2 4412.84,3915.28 USB16.13@4518.15,3915.28 ; 4280.98,5087.9 4340.06,5087.9 R28.1 4417.96,5020 4447.96,5050 4477.96,5050 4507.96,5020 ; 4378.09,4955 4378.09,4889.47 C10.1 4382.56,4835 ; R29.1@4392.96,4420 R29.1 R30.1 4397.32,4484.36 C23.2 C23.2@4398.31,4550.98 ; C23.2@4398.31,4550.98 4448.31,4600.98 USB15.12 4538.15,4622.64 USB15.14@4538.15,4645.27 ; 4507.96,5020 4538.15,5050.27 4588.15,5050.27 4618.15,5020.27 ; USB16.13@4518.15,3915.28 USB16.13@4538.15,3915.28 ; USB16.13@4538.15,3915.28 4558.15,3915.28 4588.15,3945.28 ; USB16.14@4538.15,4235.27 4538.15,4304.73 4548.15,4314.73 4548.15,4335.27 ; USB16.14@4538.15,4235.27 4588.15,4185.27 ; USB15.14@4538.15,4645.27 4538.15,4709.73 4548.15,4719.73 4548.15,4740.27 ; USB15.14@4538.15,4645.27 4598.15,4585.27 4598.15,4365.27 4568.15,4335.27 4548.15,4335.27 ; 4548.15,4740.27 4568.15,4740.27 4588.15,4760.27 ; 4588.15,3945.28 4588.15,3995.28 4598.15,4005.28 4598.15,4175.27 4588.15,4185.27 ; 4588.15,4760.27 4588.15,4790.27 4618.15,4820.27 4618.15,5020.27
  Bottom Layer w10: v1(4233.55,4530.98) 4243.55,4530.98 v1(4293.55,4580.98)
  other v1: 3847.01,3767.99 4047.01,3767.99 4247.01,3767.99 4447.01,3767.99 3647.01,3967.99 4647.01,3967.99 3647.01,4167.99 4647.01,4167.99 3647.01,4367.99 4647.01,4367.99 3647.01,4567.99 4647.01,4567.99 3647.01,4767.99 4647.01,4767.99 3647.01,4967.99 4647.01,4967.99 3847.01,5167.99 4447.01,5167.99 4047.01,5367.99 4247.01,5367.99
N1: U1.7 USB10.5 USB10.7 | length 722.9
  Top Layer w10: USB10.7 3811.91,4865.15 ; USB10.5 3773.98,4905 3801.91,4905 3811.91,4895 ; USB10.7@3773.66,4865 3811.91,4865 ; v1(3851.91,4875) 3831.91,4875 3821.91,4865 3811.91,4865 ; v1(3881.91,4865) 3861.91,4885 3831.91,4885 3821.91,4875 ; U1.7 U1.7@4051.91,4685 ; v1(4081.91,4685) U1.7@4051.91,4685 ; v1(4081.91,4715) U1.7@4051.91,4685 ; 3811.91,4865 3811.91,4865.15 ; 3811.91,4865.15 3812.07,4865.15 3821.91,4875 ; 3811.91,4865.15 3811.91,4895 ; 3811.91,4895 3821.91,4885 3821.91,4875
  Bottom Layer w10: v1(3851.91,4875) 3861.91,4865 v1(3881.91,4865) 3931.91,4865 v1(4081.91,4715) v1(4081.91,4685)
N2: U1.5 USB11.5 USB11.7 | length 700.6
  Top Layer w10: USB11.7 3804.14,4460.15 3811.91,4467.93 3811.91,4497.93 ; USB11.5 3775.1,4497.93 3811.91,4497.93 ; U1.5 U1.5@4021.91,4785 ; 3811.91,4497.93 3911.91,4497.93 3921.91,4507.93 3921.91,4685 ; 3921.91,4685 U1.5@4021.91,4785 ; 3921.91,4685 3921.91,4695 4011.91,4785 U1.5@4021.91,4785
N3: U1.3 USB12.5 USB12.7 | length 1917.3
  Top Layer w10: v1(3733.51,4136.6) v1(3733.51,4106.6) 3743.51,4096.6 ; USB12.7 3744.95,4055.16 3733.51,4066.59 3733.51,4086.59 3743.51,4096.6 ; USB12.5 3771.43,4096.6 3743.51,4096.6 ; v1(3931.91,4745) 3931.91,4795 U1.3@4021.91,4885 ; v1(3951.91,4885) U1.3@4021.91,4885 ; U1.3 U1.3@4021.91,4885
  Bottom Layer w10: v1(3733.51,4106.6) v1(3733.51,4136.6) 3871.91,4275 ; v1(3931.91,4745) 3931.91,4335 3871.91,4275 ; v1(3951.91,4885) 3931.91,4905 3841.91,4905 3811.91,4875 3811.91,4805 3841.91,4775 3841.91,4395 3871.91,4365 3871.91,4275
N5: U2.5 USB14.5 USB14.7 | length 1907.5
  Top Layer w10: U2.5 4046.91,4220 v1@4176.91,4350 ; v1(4186.91,4350) v1@4176.91,4350 ; v1(4186.91,4440) 4196.91,4430 4196.91,4370 v1@4176.91,4350 ; USB14.5 USB14.5@4516.97,4850 ; USB14.7 4546.23,4889.85 ; v1(4556.49,4839.59) 4546.49,4849.59 ; v1(4556.91,4810) 4556.91,4840 4546.91,4850 ; USB14.5@4516.97,4850 4546.91,4850 ; USB14.5@4516.97,4850 4517.39,4849.59 4546.49,4849.59 ; 4546.23,4889.85 4556.49,4879.59 4556.49,4859.59 ; 4546.23,4889.85 4547.06,4889.85 4556.91,4880 4556.91,4860 4556.49,4859.59 ; 4546.49,4849.59 4546.91,4850 ; 4546.91,4850 4556.49,4859.59
  Bottom Layer w10: v1(4186.91,4350) 4476.91,4350 4596.49,4469.59 4596.49,4799.59 v1(4556.49,4839.59) ; v1(4186.91,4440) v1(4556.91,4810)
N6: U2.3 USB15.5 USB15.7 | length 654.3
  Top Layer w10: U2.3 4046.91,4320 4136.91,4410 v1(4166.91,4410) ; USB15.5 v1@4486.49,4445.48 ; USB15.7 4491.76,4484.85 ; v1@4476.91,4455.06 v1(4476.91,4450) 4481.44,4445.48 v1@4486.49,4445.48 ; v1@4476.91,4455.06 4476.91,4470 4491.76,4484.85 ; v1@4476.91,4455.06 v1@4486.49,4445.48 ; v1@4476.91,4455.06 4476.49,4455.48 4476.49,4475.48 4485.86,4484.85 4491.76,4484.85
  Bottom Layer w10: v1(4166.91,4410) 4436.91,4410 v1(4476.91,4450)
N7: U2.1 USB16.5 USB16.7 | length 957.1
  Top Layer w10: U2.1 U2.1@4056.91,4420 ; v1(4076.91,4440) U2.1@4056.91,4420 ; v1(4106.91,4450) 4076.91,4420 U2.1@4056.91,4420 ; v1(4476.91,4080) 4486.91,4080 4492.06,4074.84 ; USB16.5 4491.44,4035.47 4482.06,4044.84 ; USB16.7 4492.06,4074.84 ; 4482.06,4044.84 4482.06,4064.84 ; 4482.06,4044.84 v1(4472.06,4054.84) 4482.06,4064.84 ; 4482.06,4064.84 4492.06,4074.84
  Bottom Layer w10: v1(4076.91,4440) 4076.91,4390 4106.91,4360 ; v1(4106.91,4450) 4106.91,4360 ; v1(4472.06,4054.84) 4446.91,4080 ; v1(4476.91,4080) 4446.91,4080 ; 4106.91,4360 4386.91,4080 4446.91,4080
P1: U1.8 USB10.6 USB10.8 | length 1166.9
  Top Layer w10: USB10.6 3772.88,4885.48 3743.51,4885.48 3733.51,4875.48 v1(3733.51,4855.48) 3743.51,4845.48 USB10.8 3773.98,4845 v1(3841.91,4845) ; v1(3961.91,4665) 3991.91,4635 U1.8 4051.91,4635 v1(4071.91,4655)
  Bottom Layer w10: v1(3733.51,4855.48) 3753.51,4855.48 3823.03,4925 3951.91,4925 3981.91,4895 3981.91,4855 4111.91,4725 4111.91,4675 4091.91,4655 v1(4071.91,4655) ; v1(3841.91,4845) 3851.91,4835 3881.91,4835 3961.91,4755 v1(3961.91,4665)
P2: U1.6 USB11.6 USB11.8 | length 585
  Top Layer w10: USB11.8 USB11.8@3774.14,4439.85 ; USB11.6 3748.66,4479.85 3738.66,4469.85 3738.66,4449.85 3748.66,4439.85 USB11.8@3774.14,4439.85 ; U1.6 3998.66,4735 3938.66,4675 3938.66,4495 3918.66,4475 3843.82,4475 3808.66,4439.85 USB11.8@3774.14,4439.85
P3: U1.4 USB12.6 USB12.8 | length 1699.8
  Top Layer w10: USB12.8 3773.98,4035 v1@3801.91,4035 ; USB12.6@3773.66,4075 v1@3801.91,4075 ; v1(3961.91,4515) 3961.91,4535 4021.91,4595 4051.91,4595 4111.91,4655 4111.91,4765 4041.91,4835 U1.4 4021.91,4835 v1(3971.91,4785) ; v1@3801.91,4035 v1@3811.91,4045 ; v1@3801.91,4035 v1(3811.91,4035) v1@3811.91,4045 ; v1@3801.91,4075 v1@3811.91,4065 ; v1@3801.91,4075 v1(3811.91,4075) v1@3811.91,4065 ; v1@3811.91,4045 v1@3811.91,4065
  Bottom Layer w10: v1(3811.91,4035) 3811.91,4065 3801.91,4075 3801.91,4085 ; v1(3811.91,4075) 3801.91,4085 ; v1(3961.91,4515) 3961.91,4335 ; v1(3971.91,4785) 3991.91,4765 3991.91,4365 3961.91,4335 ; 3801.91,4085 3801.91,4175 3961.91,4335
P5: U2.6 USB14.6 USB14.8 | length 1263.6
  Top Layer w10: U2.6 U2.6@4046.91,4170 ; v1(4076.91,4190) 4056.91,4170 U2.6@4046.91,4170 ; v1(4096.91,4230) 4096.91,4220 U2.6@4046.91,4170 ; v1(4426.91,4860) 4436.91,4870 4466.91,4870 ; v1(4456.91,4860) 4466.91,4870 ; USB14.6@4516.34,4870 4476.91,4870 ; USB14.8 4516.02,4910 4486.91,4910 4476.91,4900 4476.91,4870 ; 4466.91,4870 4476.91,4870
  Bottom Layer w10: v1(4076.91,4190) 4046.91,4220 4046.91,4280 ; v1(4096.91,4230) 4046.91,4280 ; v1(4426.91,4860) 4426.91,4830 ; v1(4456.91,4860) 4426.91,4830 ; 4046.91,4280 4046.91,4450 4426.91,4830
P6: U2.4 USB15.6 USB15.8 | length 752.8
  Top Layer w10: U2.4 4046.91,4270 v1(4156.91,4380) ; USB15.6 v1@4546.49,4465.15 ; USB15.8 4517.12,4505.15 4541.34,4505.15 ; 4541.34,4505.15 4551.34,4495.15 v1@4551.34,4470 ; 4541.34,4505.15 4546.49,4505.15 4556.49,4495.15 4556.49,4475.15 v1@4551.34,4470 ; v1@4546.49,4465.15 v1(4551.34,4465.15) v1@4551.34,4470 ; v1@4546.49,4465.15 v1@4551.34,4470
  Bottom Layer w10: v1(4156.91,4380) 4446.19,4380 4531.34,4465.15 v1(4551.34,4465.15)
P7: U2.2 USB16.6 USB16.8 | length 1724.3
  Top Layer w10: v1(3986.91,4300) 3986.91,4330 4026.91,4370 U2.2 4066.91,4370 v1(4136.91,4440) ; USB16.6 4517.12,4054.53 v1@4542.39,4054.53 ; USB16.8 v1@4542.39,4094.53 ; v1@4542.39,4054.53 v1@4552.39,4064.53 ; v1@4542.39,4054.53 v1(4552.39,4054.53) v1@4552.39,4064.53 ; v1@4542.39,4094.53 v1@4552.39,4084.53 ; v1@4542.39,4094.53 v1(4552.39,4094.53) v1@4552.39,4084.53 ; v1@4552.39,4064.53 v1@4552.39,4084.53
  Bottom Layer w10: v1(3986.91,4300) 3986.91,4210 4172.39,4024.53 4482.39,4024.53 4512.39,4054.53 v1(4552.39,4054.53) ; v1(4136.91,4440) 4126.91,4430 4126.91,4370 4386.91,4110 4496.91,4110 4512.39,4094.53 v1(4552.39,4094.53)
pads on no net: U1.15 U2.7 U2.8 U2.15 USB9.3 USB9.9 USB10.3 USB10.9 USB11.3 USB11.9 USB12.3 USB12.9 USB14.3 USB14.9 USB15.3 USB15.9 USB16.3 USB16.9

## Polygon pours and split planes (outlines as drawn)
GND on Top Layer (solid, remove dead copper, pour order 0): 3000,5775 5050,5775 5050,3615 3000,3615
GND on Bottom Layer (solid, remove dead copper, pour order 2): 3000,5775 5595,5775 5595,3000 3000,3000

## Keep-outs
Board Outline Layer:
  lines w10: 4762.8,3891.42 4762.8,5058.58 4418.05,5408.03 3875,5408.03 3524.14,5052.16 3524.14,3885 3525,3885 3725,3685 4565,3685 4765,3885

## Silkscreen, mask and mechanical layers (free items; w line width, h text height)
Top Silkscreen Layer:
  text "@pizzalover125" at 4365,5365 h60 r315
  text "made by" at 3675,5080 h80 r45